# Altium PCB GameBoard.PcbDoc
Units mm, origin at the board's own origin, x right, y up, seen from the top; angles counter-clockwise.
Board outline 100.33 x 35.56 mm, 2 copper layers (Top Layer, Bottom Layer); 17 components, 25 nets, 96 pads, 0 vias.
Unrouted connection lines stored in the file: 4.
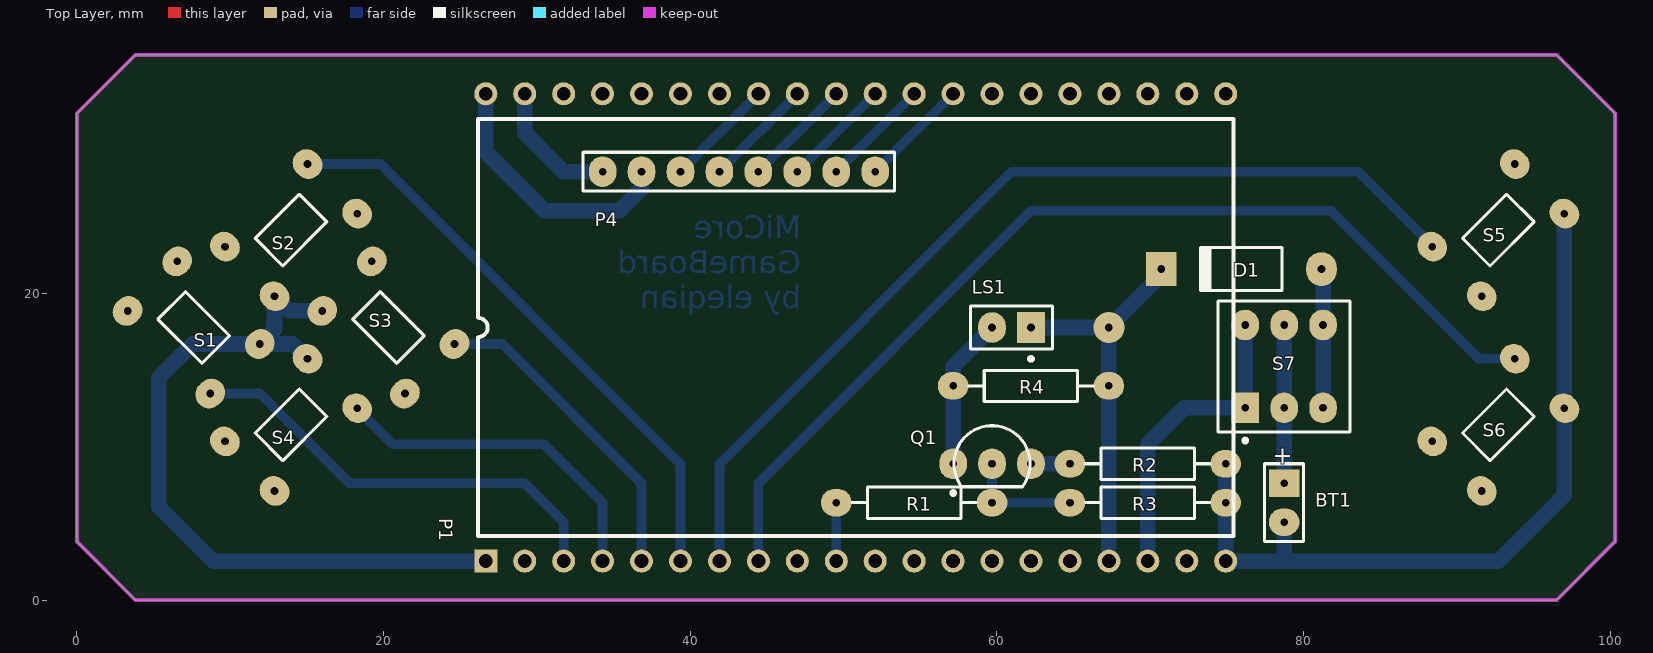
[diagram p0: Top Layer view]
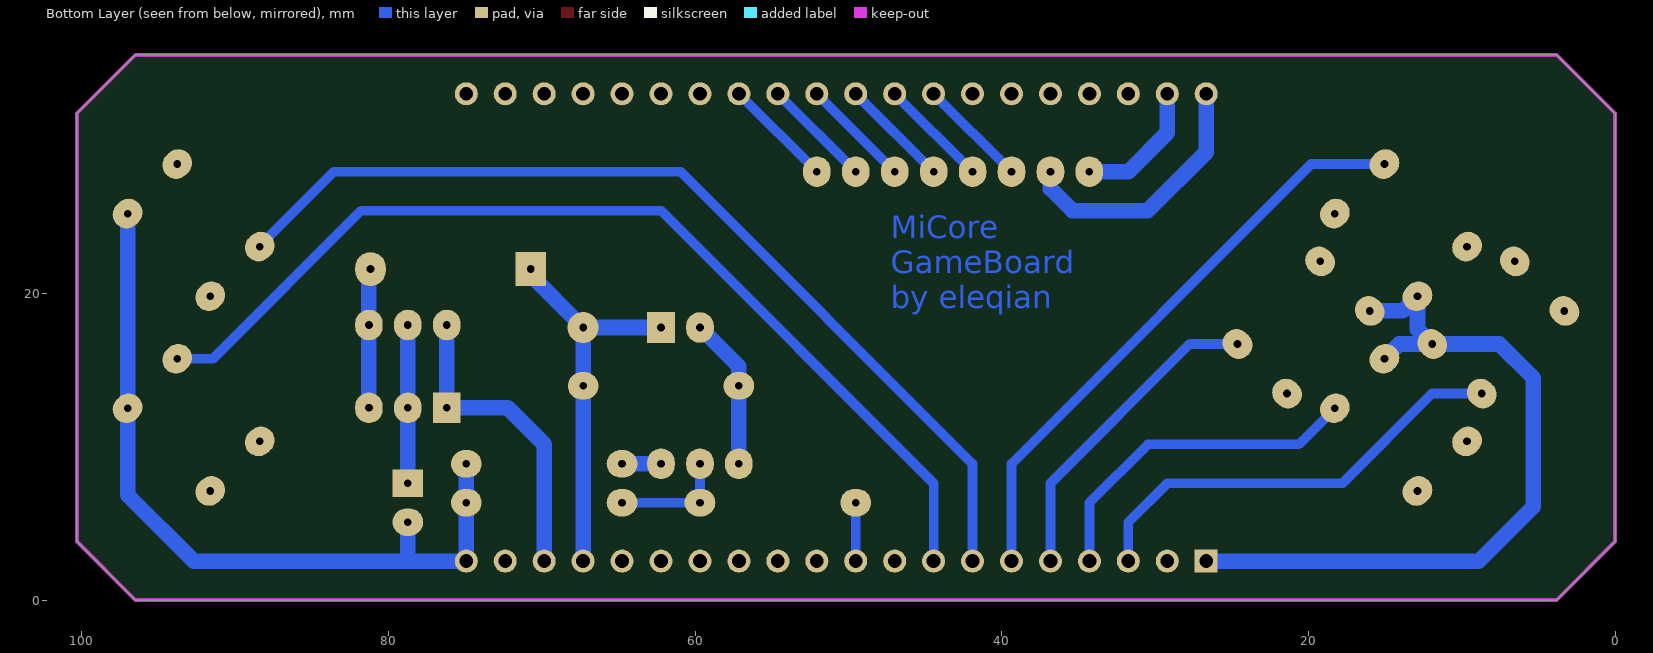
[diagram p1: Bottom Layer view, seen from below]

## Layer stack, top to bottom
Top Layer: signal copper 0.0356
Dielectric: dielectric 0.32, FR-4, Dk 4.8
Bottom Layer: signal copper 0.0356

## Board outline
0,3.81 0,31.75 3.81,35.56 96.52,35.56 100.33,31.75 100.33,3.81 96.52,0 3.81,0

## Design rules (kind name [scope] priority, off if disabled: settings)
Clearance [All] p1: gap=0.254
ComponentClearance [All] p1 off: gap=0.254 collisioncheckmode=3 verticalgap=0.254 showdistances=FALSE
PolygonConnect [All] p1: connectstyle=Relief reliefconductorwidth=0.254 reliefentries=4 polygonreliefangle="90 Angle"
RoutingVias [All] p1: holewidth=0.711 width=1.27 viastyle="Through Hole" minholewidth=0.711 minwidth=1.27 maxholewidth=0.711 maxwidth=1.27
SilkscreenOverComponentPads [All] p1: minsilkscreentomaskgap=0.254
SolderMaskExpansion [All] p1: expansion=0.102
Width [All] p1: maxlimit=1.016 minlimit=0.254 preferedwidth=0.508
26 further rules are at their usual default settings.

## Components (designator, comment, footprint, x,y, rotation, side; value= is the part's Value field where it differs from the comment)
BT1 "Battery" BAT-2 78.74,6.35 r270 top
D1 "Diode 1N5819" DO-204AL 75.946,21.59 r180 top
LS1 "Speaker" PIN2 62.23,17.78 r180 top
P1 "MiCore" MICORE 26.67,2.54 r90 top
P4 "Header 8" HDR1X8 52.07,27.94 r180 top
Q1 "S8050" TO-92 59.69,8.89 r270 top
R1 "Res2" AXIAL-0.4 54.61,6.35 r0 top
R2 "Res2" AXIAL-0.4 69.85,8.89 r180 top
R3 "Res2" AXIAL-0.4 69.85,6.35 r180 top
R4 "Res2" AXIAL-0.4 62.23,13.97 r0 top
S1 "SW-PB4" SW-PB-4P 7.62,17.78 r315 top
S2 "SW-PB4" SW-PB-4P 13.97,24.13 r225 top
S3 "SW-PB4" SW-PB-4P 20.32,17.78 r135 top
S4 "SW-PB4" SW-PB-4P 13.97,11.43 r45 top
S5 "SW-PB4" SW-PB-4P 92.71,24.13 r225 top
S6 "SW-PB4" SW-PB-4P 92.71,11.43 r225 top
S7 "SW-DPDT" DPDT-6P 78.74,15.24 r90 top

## Footprints (in the part's own frame and the unit in brackets; to place one, negate y for a bottom-side part, rotate by r counter-clockwise, add the part's x,y. Pads: shape width x height; smd on the part's side, far side on the other; paste and mask are expansions set on the pad)
AXIAL-0.4 [mm] "Axial Device, Thru-Hole; 2 Leads; 0.4 in Pin Spacing"
  oval 2x1.8 hole 0.5: 1(-5.08,0) 2(5.08,0)
  silkscreen extent -4.06,-1.02 4.06,1.02
BAT-2 [mm] "Battery; 2 Leads"
  rect 1.8x2 hole 0.5: 1(-1.27,0)
  oval 1.8x2 hole 0.5: 2(1.27,0)
  silkscreen extent -2.54,-1.27 2.54,1.27
DO-204AL [mm] "Diode, Axial; Body 5.2 x 2.7 mm (LxDia. max), Lead Dia. 0.86 mm (max)"
  oval 2x2.2 hole 0.5: 1(-5.23,0)
  rect 2x2.2 hole 0.5: 2(5.23,0)
  silkscreen extent -2.65,-1.4 2.75,1.4
DPDT-6P [mm]
  rect 2x1.8 hole 0.5: 1(-2.7,2.54)
  oval 2x1.8 hole 0.5: 2(-2.7,0) 3(-2.7,-2.54) 4(2.7,-2.54) 5(2.7,0) 6(2.7,2.54)
  silkscreen extent -4.96,-4.3 4.28,4.3, body extent -4.3,-4.3 4.3,4.3, height 14
HDR1X8 [mm] "Connector; Header; 8 Position"
  oval 1.8x2 hole 0.5: 1(0,0) 2(2.54,0) 3(5.08,0) 4(7.62,0) 5(10.16,0) 6(12.7,0) 7(15.24,0) 8(17.78,0)
  silkscreen extent -1.27,-1.27 19.05,1.27
MICORE [mm] "MiCore核心"
  rect 1.5x1.5 hole 0.9: 1(0,0)
  round 1.5 hole 0.9: 2(0,-2.54) 3(0,-5.08) 4(0,-7.62) 5(0,-10.16) 6(0,-12.7) 7(0,-15.24) 8(0,-17.78) 9(0,-20.32) 10(0,-22.86) 11(0,-25.4) 12(0,-27.94) 13(0,-30.48) 14(0,-33.02) 15(0,-35.56) 16(0,-38.1) 17(0,-40.64) 18(0,-43.18) 19(0,-45.72) 20(0,-48.26) 21(30.48,-48.26) 22(30.48,-45.72) 23(30.48,-43.18) 24(30.48,-40.64) 25(30.48,-38.1) 26(30.48,-35.56) 27(30.48,-33.02) 28(30.48,-30.48) 29(30.48,-27.94) 30(30.48,-25.4) 31(30.48,-22.86) 32(30.48,-20.32) 33(30.48,-17.78) 34(30.48,-15.24) 35(30.48,-12.7) 36(30.48,-10.16) 37(30.48,-7.62) 38(30.48,-5.08) 39(30.48,-2.54) 40(30.48,0)
  silkscreen extent 1.64,-48.77 28.84,0.51, body extent -1.27,-50.22 31.75,1.27, height 14.05
PIN2 [mm] "Photosensitive Diode; 2 Leads"
  rect 1.8x2 hole 0.5: 1(0,0)
  oval 1.8x2 hole 0.5: 2(2.54,0)
  silkscreen extent -1.4,-1.4 3.94,2.17
SW-PB-4P [mm]
  oval 1.8x2 hole 0.5: 1(-3.81,2.286) 2(-3.81,-2.286) 3(3.81,-2.286) 4(3.81,2.286)
  silkscreen extent -2.03,-1.27 2.03,1.27, body extent -3.05,-3.05 3.05,3.05, height 3.5
TO-92 [mm] "TO, Flat Index; 3 In-Line, Axial Leads; Body Dia. 4.5mm; Leads 0.51 x 0.48 mm (max)"
  oval 2x1.8 hole 0.5: 1(0,-2.54) 2(0,0) 3(0,2.54)
  silkscreen extent -2.48,-2.66 2.03,2.48, body extent -2.5,-2.5 1.5,2.5, height 6.86

## Part data
BT1: "Multicell Battery"
D1: library part "Diode 11DQ03", "Schottky Rectifier"
LS1: "Loudspeaker"
P1: "MiCore核心"
P4: "Header, 8-Pin"
Q1: library part NPN, "NPN Bipolar Transistor"
R1 R2 R3 R4: "Resistor"
S1 S2 S3 S4 S5 S6: library part SW, "普?"
S7: library part SW, "双刀双Ö"

## Free pads (board coordinates)
  round 2.032 hole 0.5: 1(67.31,17.78)

## Nets (pads, with @x,y where several pads share a name; then routed paths per layer and width w, separated by ;. In a path a pad name is that pad's centre, name@x,y a point inside that pad or via, vN(x,y) a via of type N, cw(c..) or ccw(c..) an arc to the next point about the centre after c; other vN are vias at no path point)
GND: BT1.2 P1.1 P1.20 P1.40 P4.7 R2.1 R3.1 S1.4 S2.4 S3.4 S4.4 S5.1 S6.1 | length 117.6
  Bottom Layer w1.016: S4.4 14.086,16.702 S1.4 ; S3.4 13.854,18.858 S2.4 12.892,17.664 S1.4 ; P1.1 8.89,2.54 5.334,6.096 5.334,14.478 7.558,16.702 S1.4 ; P1.40 26.67,29.21 30.48,25.4 35.39,25.4 36.83,26.84 P4.7 ; R2.1 R3.1 P1.20 78.74,2.54 ; BT1.2 78.74,2.54 ; S5.1 S6.1 97.021,6.851 92.71,2.54 78.74,2.54
KEY1: P1.3 S1.3 | length 29.1
  Bottom Layer w0.635: S1.3 11.931,13.469 17.78,7.62 29.21,7.62 31.75,5.08 P1.3
KEY2: P1.6 S2.2 | length 38.8
  Bottom Layer w0.635: S2.2 19.819,28.441 39.37,8.89 P1.6
KEY3: P1.5 S3.2 | length 21
  Bottom Layer w0.635: S3.2 27.748,16.702 36.83,7.62 P1.5
KEY4: P1.4 S4.3 | length 22.4
  Bottom Layer w0.635: S4.3 20.628,10.16 30.48,10.16 34.29,6.35 P1.4
KEY5: P1.7 S5.3 | length 62.7
  Bottom Layer w0.635: P1.7 41.91,8.89 60.96,27.94 83.566,27.94 S5.3@88.392,23.114
KEY6: P1.8 S6.2 | length 65.8
  Bottom Layer w0.635: P1.8 44.45,7.62 62.23,25.4 81.788,25.4 91.447,15.741 S6.2
NetBT1_1: BT1.1 S7.2 S7.5 | length 10.3
  Bottom Layer w1.016: BT1.1 S7.2 S7.5
NetD1_1: D1.1 S7.3 S7.4 | length 9.1
  Bottom Layer w1.016: D1.1 81.28,21.486 S7.4 S7.3
NetLS1_2: LS1.2 Q1.1 R4.1 | length 9.9
  Bottom Layer w1.016: Q1.1 57.15,15.24 LS1.2
NetP1_12: P1.12 P1.13
NetP1_14: P1.14 P1.15
NetP1_37: P1.37 P1.38
NetQ1_2: Q1.2 R1.2 R3.2 | length 7.6
  Bottom Layer w0.635: Q1.2 R1.2 R3.2
NetQ1_3: Q1.3 R2.2 | length 2.5
  Bottom Layer w1.016: Q1.3 R2.2
PB6: P1.33 P4.6 | length 7.2
  Bottom Layer w0.635: P4.6 P1.33
PB7: P1.32 P4.5 | length 7.2
  Bottom Layer w0.635: P4.5 P1.32
PB8: P1.31 P4.4 | length 7.2
  Bottom Layer w0.635: P4.4 P1.31
PB9: P1.30 P4.3 | length 7.2
  Bottom Layer w0.635: P4.3 P1.30
PB10: P1.29 P4.2 | length 7.2
  Bottom Layer w0.635: P4.2 P1.29
PB11: P1.28 P4.1 | length 7.2
  Bottom Layer w0.635: P4.1 P1.28
SND_OUT: P1.10 R1.1 | length 3.8
  Bottom Layer w0.635: P1.10 R1.1
VBAT: P1.18 S7.1 S7.6 | length 20.4
  Bottom Layer w1.016: P1.18 69.85,10.16 72.23,12.54 S7.1 S7.6
VCC: P1.39 P4.8 | length 8.7
  Bottom Layer w1.016: P1.39 29.21,30.48 31.75,27.94 P4.8
VIN: D1.2 LS1.1 P1.17 pad.1 R4.2 | length 25.4
  Bottom Layer w1.016: LS1.1 pad.1 ; P1.17 pad.1 ; D1.2@70.918,21.388 pad.1
pads on no net: P1.2 P1.9 P1.11 P1.16 P1.19 P1.21 P1.22 P1.23 P1.24 P1.25 P1.26 P1.27 P1.34 P1.35 P1.36 S1.1 S1.2 S2.1 S2.3 S3.1 S3.3 S4.1 S4.2 S5.2 S5.4 S6.3 S6.4

## Keep-outs
Keep-Out Layer:
  the board outline again, w0.254

## Other copper
Bottom Layer:
  text "MiCore" at 47.244,23.114 h2.54
  text "GameBoard" at 47.244,20.828 h2.54
  text "by eleqian" at 47.244,18.542 h2.54

## Dimensions
0,0 to 100.33,0 on Mechanical 13
100.33,0 to 100.33,35.56 on Mechanical 13

## Text inside footprints (layer, text, board x,y; h text height)
BT1: Top Overlay "+" at 78.163,10.02 h1.15 r270